# EAGLE board Mergen Telemetri + Ateşleme (EAGLE 9.6.2)
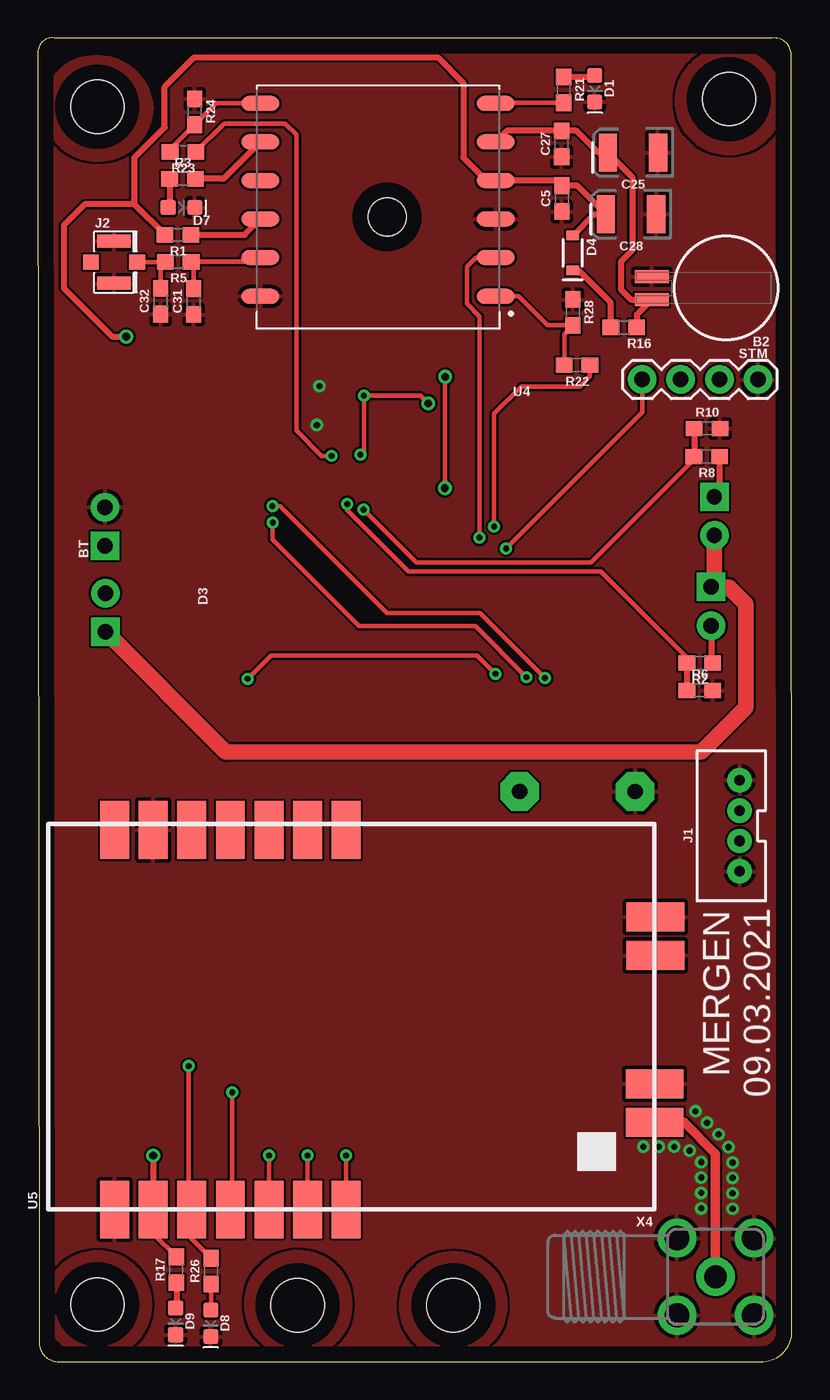
[diagram p0: board, top side]
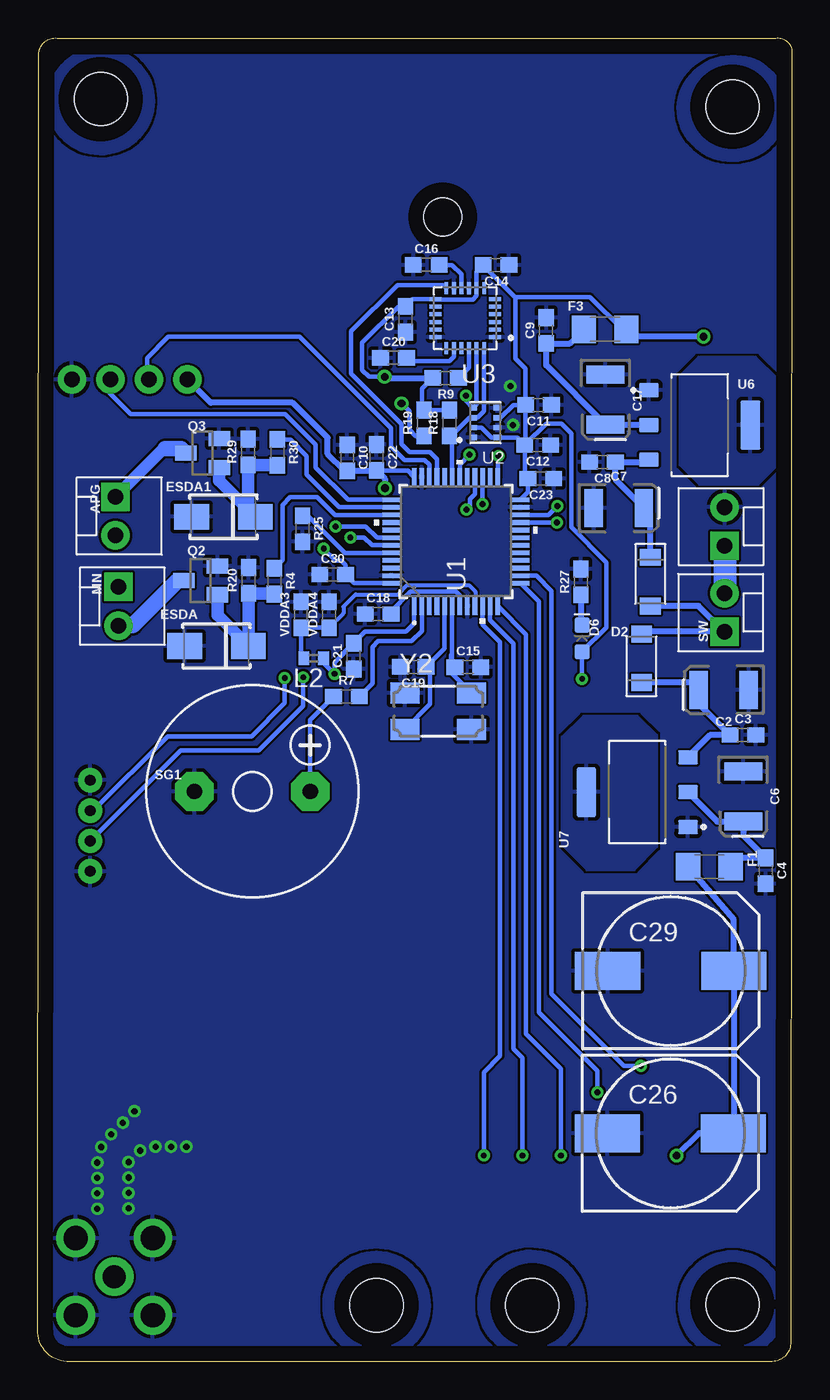
[diagram p1: board, bottom side, seen from below]

Size 49.66 x 87.16 mm. Coordinates in mm from the lower left corner, seen from the top.
Outline: 0,86.34 0.08,1.3 arc90 1.27,0 47.6,0 arc90 49.66,1.88 49.61,86.19 arc90 48.39,87.15 1.06,87.15 arc90 0,86.34
Copper layers (1*16): Top 0.035mm / dielectric 1.5mm / Bottom 0.035mm
Design rules "default": minimum track width 6mil, minimum drill 0.35mm, track to track 6mil, track to pad 6mil, pad to pad 6mil, via to via 6mil, smd to smd 6mil, copper to edge 40mil, drill to drill 6mil, minimum pad ring 10mil, minimum via ring 8mil, stop-mask expansion 4mil, vias tented up to drill 0mil, thermal gap 10mil
Net classes: 1 Power: width 0.305 mm
Holes 3.5 mm at 3.91,82.63 45.52,83.13 27.36,3.71 3.91,3.76 17.09,3.71
Holes 2.5 mm at 23,75.38

## Footprints (pad centres in the part's own frame; a part is rotated, then mirrored left to right if it is on the bottom)
MOLEX-1X2 = drill 1.016 pad 1.88 square: 1 0,0 | drill 1.016 pad 1.88: 2 2.54,0
BATTCON-6.8MM = smd 2.25 x 0.85: + 4.87,0.75; - 4.87,-0.75
EIA3528 = smd 1.2 x 2.5: A 1.65,0; C -1.65,0
0603 = smd 1.1 x 1: 1 -0.85,0; 2 0.85,0
150CLZ-1010 = smd 4.3 x 2.5: + 4.15,0; - -4.15,0
LED-0603 = smd 1 x 1: A -0.877,0; C 0.877,0
SODFL3718X115 = smd 1.115 x 1.361: 1 -1.6,0; 2 1.6,0
SOD-323 = smd 0.63 x 0.83: A 1.15,0; C -1.15,0
WE-TVSP_DO-214AC_UNIDIRECTIONAL = smd 2.3 x 1.7: 1 -2.1,0; 2 2.1,0
1206 = smd 1.6 x 1.8: 1 -1.4,0; 2 1.4,0
JST-4-PTH-VERT = drill 0.7 pad 1.6: 1 -3,-0.55; 2 -1,-0.55; 3 1,-0.55; 4 3,-0.55
U.FL = smd 2.2 x 0.85: 1 0,1.375; 2 0,-1.375 | smd 1.05 x 1: FEED 1.525,0; NC -1.525,0
0402 = smd 0.7 x 0.9: 1 -0.65,0; 2 0.65,0
SOT23 = smd 1 x 1.4: 1 -0.95,-1.1; 2 0.95,-1.1; 3 0,1.1
F/CM12P = drill 1.016 pad 2.54 octagon: + 3.81,0; - -3.81,0
1X04 = drill 1.016 pad 1.88: 1 0,0; 2 2.54,0; 3 5.08,0; 4 7.62,0
LQFP48-7X7MM = smd 1.194 x 0.305: 1 -4.25,2.75; 2 -4.25,2.25; 3 -4.25,1.75; 4 -4.25,1.25; 5 -4.25,0.75; 6 -4.25,0.25; 7 -4.25,-0.25; 8 -4.25,-0.75; 9 -4.25,-1.25; 10 -4.25,-1.75; 11 -4.25,-2.25; 12 -4.25,-2.75; 25 4.25,-2.75; 26 4.25,-2.25; 27 4.25,-1.75; 28 4.25,-1.25; 29 4.25,-0.75; 30 4.25,-0.25; 31 4.25,0.25; 32 4.25,0.75; 33 4.25,1.25; 34 4.25,1.75; 35 4.25,2.25; 36 4.25,2.75 | smd 0.305 x 1.194: 13 -2.75,-4.25; 14 -2.25,-4.25; 15 -1.75,-4.25; 16 -1.25,-4.25; 17 -0.75,-4.25; 18 -0.25,-4.25; 19 0.25,-4.25; 20 0.75,-4.25; 21 1.25,-4.25; 22 1.75,-4.25; 23 2.25,-4.25; 24 2.75,-4.25; 37 2.75,4.25; 38 2.25,4.25; 39 1.75,4.25; 40 1.25,4.25; 41 0.75,4.25; 42 0.25,4.25; 43 -0.25,4.25; 44 -0.75,4.25; 45 -1.25,4.25; 46 -1.75,4.25; 47 -2.25,4.25; 48 -2.75,4.25
XDCR_BMP280 = smd 0.5 x 0.35: 1 0.8,0.975; 2 0.8,0.325; 3 0.8,-0.325; 4 0.8,-0.975; 5 -0.8,-0.975; 6 -0.8,-0.325; 7 -0.8,0.325; 8 -0.8,0.975
QFN50P400X400X95-24N = smd 0.79 x 0.26: 1 -1.97,1.25; 2 -1.97,0.75; 3 -1.97,0.25; 4 -1.97,-0.25; 5 -1.97,-0.75; 6 -1.97,-1.25; 13 1.97,-1.25; 14 1.97,-0.75; 15 1.97,-0.25; 16 1.97,0.25; 17 1.97,0.75; 18 1.97,1.25 | smd 0.26 x 0.79: 7 -1.25,-1.97; 8 -0.75,-1.97; 9 -0.25,-1.97; 10 0.25,-1.97; 11 0.75,-1.97; 12 1.25,-1.97; 19 1.25,1.97; 20 0.75,1.97; 21 0.25,1.97; 22 -0.25,1.97; 23 -0.75,1.97; 24 -1.25,1.97
XCVR_L86 = smd 2.5 x 1: 1 -7.75,6.35; 2 -7.75,3.81; 3 -7.75,1.27; 4 -7.75,-1.27; 5 -7.75,-3.81; 6 -7.75,-6.35; 7 7.75,-6.35; 8 7.75,-3.81; 9 7.75,-1.27; 10 7.75,1.27; 11 7.75,3.81; 12 7.75,6.35
E32-868T30S = smd 3.81 x 1.905: 3V3 12.3,5.08; AUX -12.7,7.62; GND@0 -12.7,12.7; GND@1 12.3,10.16; M0 -12.7,-2.54; M1 -12.7,0; PB0 12.3,-2.54; PB1 12.3,0; PB3 12.3,2.54; RST 12.3,12.7; RX -12.7,2.54; SWIM 12.3,7.62; TX -12.7,5.08; VCC -12.7,10.16 | smd 1.905 x 3.81: ANT -6.97,-22.86; GND@2 6.57,-22.91; GND@3 4.03,-22.91; GND@4 -4.43,-22.86
SOT229P700X180-4N = smd 0.93 x 1.31: 1 -2.29,-3.345; 2 0,-3.345; 3 2.29,-3.345 | smd 3.24 x 1.31: 4 0,3.345
SMA90_DIP = drill 1.5 pad 2.54: ANTENNA 0,0 | drill 1.6 pad 2.54: GND1 -2.54,2.54; GND2 2.54,2.54; GND3 -2.54,-2.54; GND4 2.54,-2.54
OSCCC500X320X110-4N = smd 1.9 x 1.4: 1 -2.2,-1.2; 2 2.2,-1.2; 3 2.2,1.2; 4 -2.2,1.2

## Placement (x,y rotation side)
APG  [MOLEX-1X2]  44.55,56.95 270 bottom
B2  6.8MM_COIN_CELL  [BATTCON-6.8MM]  45.31,70.69 180 top
BT  [MOLEX-1X2]  4.42,53.72 90 bottom
C2  22uF  [EIA3528]  4.5,44.22 180 bottom
C3  100nF  [0603]  3.23,41.25 0 bottom
C4  100nF  [0603]  1.73,32.31 270 bottom
C5  100nF  [0603]  34.52,76.58 90 top
C6  22uF  [EIA3528]  3.2,37.21 270 bottom
C7  22uF  [EIA3528]  11.4,56.21 0 bottom
C8  100nF  [0603]  12.47,59.23 180 bottom
C9  100nF  [0603]  16.18,67.89 90 bottom
C10  4.7uF  [0603]  29.29,59.51 270 bottom
C11  100nF  [0603]  16.69,62.99 180 bottom
C12  100nF  [0603]  16.74,60.35 180 bottom
C13  100nF  [0603]  25.45,68.63 90 bottom
C14  10nF  [0603]  19.48,72.21 180 bottom
C15  25pF  [0603]  21.34,45.72 0 bottom
C16  100nF  [0603]  24.08,72.21 0 bottom
C17  22uF  [EIA3528]  12.27,63.35 270 bottom
C18  0.1uF  [0603]  27.25,49.23 0 bottom
C19  25pF  [0603]  24.94,45.75 180 bottom
C20  2.2nF  [0603]  26.24,66.09 0 bottom
C21  0.1uF  [0603]  28.85,46.46 90 bottom
C22  0.1uF  [0603]  27.36,59.54 270 bottom
C23  0.1uF  [0603]  16.54,58.14 180 bottom
C25  4.7uF  [EIA3528]  39.19,79.6 180 top
C26  1000uF  [150CLZ-1010]  8,15.04 0 bottom
C27  100nF  [0603]  34.49,80.19 90 top
C28  10uF  [EIA3528]  39.07,75.54 180 top
C29  1000uF  [150CLZ-1010]  7.98,25.73 0 bottom
C30  0.1uF  [0603]  30.25,51.82 0 bottom
C31  0.1uF  [0603]  10.26,69.8 90 top
C32  0.1uF  [0603]  8.08,69.82 90 top
D1  [LED-0603]  36.68,83.82 270 top
D2  MBR0520LT1G  [SODFL3718X115]  9.91,46.3 90 bottom
D3  MBR0520LT1G  [SODFL3718X115]  9.32,51.36 270 bottom
D4  0.5A/40V/420mV  [SOD-323]  35.23,73 90 top
D6  [LED-0603]  13.82,47.62 90 bottom
D7  [LED-0603]  9.45,76 0 top
D8  [LED-0603]  11.38,2.51 270 top
D9  [LED-0603]  9.07,2.64 270 top
ESDA  12V  [WE-TVSP_DO-214AC_UNIDIRECTIONAL]  37.9,47.12 180 bottom
ESDA1  12V  [WE-TVSP_DO-214AC_UNIDIRECTIONAL]  37.44,55.63 180 bottom
F1  1A  [1206]  5.44,32.59 180 bottom
F3  0.75A  [1206]  12.29,67.97 0 bottom
J1  [JST-4-PTH-VERT]  45.67,35.28 90 top
J2  U.FL  [U.FL]  5.02,72.4 0 top
L2  BLM15HB221SN1  [0402]  31.5,46.3 180 bottom
MN  [MOLEX-1X2]  44.35,51 270 bottom
Q2  IRLML6344TRPBF  [SOT23]  38.94,51.44 90 bottom
Q3  IRLML6344TRPBF  [SOT23]  38.81,59.82 90 bottom
R1  10k  [0603]  9.22,74.19 180 top
R2  10k  [0603]  43.59,46 180 top
R3  100  [0603]  9.52,77.88 0 top
R4  20  [0603]  34.09,51.38 270 bottom
R5  0  [0603]  9.25,72.42 180 top
R6  3k3  [0603]  43.59,44.2 0 top
R7  220  [0603]  29.34,43.79 0 bottom
R8  10k  [0603]  44.04,59.59 180 top
R9  4k7  [0603]  22.81,64.77 180 bottom
R10  3k3  [0603]  44.07,61.44 0 top
R16  1k  [0603]  38.58,68.1 180 top
R17  1k5  [0603]  9.12,6.05 90 top
R18  4k7  [0603]  22.56,61.8 90 bottom
R19  4k7  [0603]  24.23,61.8 90 bottom
R20  4k7  [0603]  35.79,51.44 90 bottom
R21  470  [0603]  34.62,83.74 270 top
R22  680  [0603]  35.51,65.61 180 top
R23  680  [0603]  9.55,79.65 180 top
R24  10k  [0603]  10.31,82.3 270 top
R25  10k  [0603]  32.23,54.84 270 bottom
R26  3k3  [0603]  11.4,5.94 90 top
R27  1k  [0603]  13.89,51.33 90 bottom
R28  10k  [0603]  35.23,69.09 270 top
R29  4k7  [0603]  35.81,59.89 90 bottom
R30  20  [0603]  33.88,59.87 270 bottom
SG1  F/CM12P  [F/CM12P]  35.53,37.54 0 bottom
STM  [1X04]  47.42,64.67 180 top
SW  [MOLEX-1X2]  4.45,48.06 90 bottom
U1  [LQFP48-7X7MM]  22.12,54 90 bottom
U2  BMP280  [XDCR_BMP280]  20.19,61.82 180 bottom
U3  MPU-6050  [QFN50P400X400X95-24N]  21.51,68.71 180 bottom
U4  L86  [XCVR_L86]  22.4,76.5 180 top
U5  [E32-868T30S]  17.75,22.71 90 top
U6  AMS1117-3.3  [SOT229P700X180-4N]  6.07,61.67 270 bottom
U7  AMS1117-3.3  [SOT229P700X180-4N]  10.19,37.49 90 bottom
VDDA3  1uF  [0603]  32.33,49.17 90 bottom
VDDA4  100nF  [0603]  30.48,49.17 90 bottom
X4  [SMA90_DIP]  44.63,5.59 90 top
Y2  ABM3B-26.000MHZ-10-1-U-T  [OSCCC500X320X110-4N]  23.29,42.82 0 bottom

## Library data of the parts
APG BT MN SW = SparkFun-Connectors; SF_ID: PRT-09918
B2 = SparkFun-Batteries; PROD_ID: BATT-13734
C2 C6 C7 C17 C25 C28 = SparkFun-Capacitors; PROD_ID: CAP-08310
C3-C5 C8-C16 C18-C23 C27 C30-C32 = SparkFun-Capacitors; PROD_ID: CAP-00868
C26 C29 X4 = adafruit
D1 D6-D9 = SparkFun-LED
D2 D3 = Diode; CATEGORY: Diode; DESCRIPTION: DIODE SCHOTTKY 20V 500MA SOD123; MANUFACTURER: ON Semiconductor; MPN: MBR0520LT1G; SUB-CATEGORY: Schottky
D4 = SparkFun-DiscreteSemi; PROD_ID: DIO-10955
ESDA ESDA1 = Wurth_EMC Components_WE-TVSP; DATASHEET-URL: https://www.we-online.com/catalog/datasheet/824500102.pdf; IPEAK: 2.5A; MOUNT: SMT; PART-NUMBER: 824500102; PDISS: 400W; VBR: 117V; VCLAMP: 162V
F1 F3 = SparkFun-Fuses; PROD_ID: RES-08585
J1 = SparkFun-Connectors; PROD_ID: CONN-13251
J2 = SparkFun-Connectors; PROD_ID: CONN-09193; SF_ID: WRL-09144
L2 = inductors
Q2 Q3 = IRLML6344TRPBF (1); AVAILABILITY: Unavailable; DESCRIPTION: RoHS Compliant | Low RDS(on) | Industry-Standard Pinout | Compatible with Existing Surface Mount Techniques | Qualified MSL1 | SOT-23 Footprint; MF: Infineon; MP: IRLML6344TRPBF; PACKAGE: SOT-23-3 International Rectifier; PRICE: None
R1-R10 R16-R30 = SparkFun-Resistors; PROD_ID: RES-07856
SG1 = buzzer; OC_FARNELL: unknown; OC_NEWARK: unknown
STM = SparkFun-Connectors; PROD_ID: CONN-09696
U1 = STM32F303; BUILT_BY: EMA_UL_Team; COPYRIGHT: Copyright (C) 2018 Accelerated Designs. All rights reserved; MANUFACTURER_PART_NUMBER: STM32F303CCT6; SOURCELIBRARY: Updates_to_database_2020-10-19; VENDOR: STMicroelectronics
U2 = BMP280; AVAILABILITY: Warning; DESCRIPTION: Pressure Sensor 4.35PSI ~ 15.95PSI (30kPa ~ 110kPa) Absolute 16b 8-SMD; MF: Bosch; MP: BMP280; PACKAGE: SMD-8 Bosch Sensortec; PRICE: None; PURCHASE-URL: https://pricing.snapeda.com/search/part/BMP280/?ref=eda
U3 = MPU-6050; AVAILABILITY: Warning; DESCRIPTION: Accelerometer, Gyroscope, 6 Axis Sensor I²C Output; MF: TDK InvenSense; MP: MPU-6050; PACKAGE: QFN-24 InvenSense; PRICE: None; PURCHASE-URL: https://pricing.snapeda.com/search/part/MPU-6050/?ref=eda
U4 = L86; AVAILABILITY: Unavailable; DESCRIPTION: L86 is an ultra-compact GNSS POT (Patch on Top) module with an embedded 18.4mm × 18.4mm × 4.0mm patch antenna and utilizes the MediaTek new generation GNSS chipset MT3333 that achieves the perfect performance; MF: Quectel; MP: L86; PACKAGE: PowerSFN-8 Quectel; PRICE: None
U5 = E32-868T30S
U6 U7 = AMS1117-3.3; AVAILABILITY: Unavailable; DESCRIPTION: Sot223/Pkg 1-Amp 3.3-Volt Low Drop Out Voltage Regulatator; MF: Advanced Monolithic Systems; MP: AMS1117-3.3; PACKAGE: SOT-89 ams; PRICE: None
VDDA3 VDDA4 = SparkFun-Capacitors; PROD_ID: CAP-00810
Y2 = ABM3B-26.000MHZ-10-1-U-T; AVAILABILITY: Good; DESCRIPTION: 26MHz ±10ppm Crystal 10pF 50 Ohms 4-SMD, No Lead; MF: Abracon; MP: ABM3B-26.000MHZ-10-1-U-T; PACKAGE: SMD-4 Abracon LLC; PRICE: None; PURCHASE-URL: https://pricing.snapeda.com/search/part/ABM3B-26.000MHZ-10-1-U-T/?ref=eda

## Nets
3.3V: C5.2 C10.2 C11.2 C12.2 C13.2 C14.2 C21.2 C22.2 C23.2 C28.A C30.2 D4.A D6.A F3.2 L2.1 R1.2 R9.2 R18.2 R19.2 STM.4 U1.1 U1.24 U1.36 U1.48 U2.2 U2.6 U2.8 U3.8 U3.13 U4.4
5V: C26.+ C29.+ F1.2 R17.2 U5.VCC
APG: APG.1 Q3.3 R8.1
APG_F: R30.1 U1.38
APG_S: R8.2 R10.1 U1.28
AUX: R26.2 U1.14 U5.AUX
BT0: R25.1 U1.44
BZZR: R7.2 U1.2
FN: R23.1 U1.25
GND: B2.- BT.2 C2.C C3.2 C4.2 C5.1 C6.C C7.C C8.2 C9.2 C10.1 C11.1 C12.1 C13.1 C14.1 C15.2 C16.1 C17.C C18.1 C19.2 C20.1 C21.1 C22.1 C23.1 C25.C C26.- C27.1 C28.C C29.- C30.1 C31.1 C32.1 D1.C D7.C D8.C D9.C ESDA1.2 ESDA.2 J1.1 J1.4 J2.1 J2.2 Q2.2 Q3.2 R6.2 R10.2 R20.2 R24.1 R25.2 R27.2 R28.1 R29.2 SG1.- STM.1 U1.8 U1.23 U1.35 U1.47 U2.1 U2.5 U2.7 U3.1 U3.9 U3.11 U3.18 U4.3 U4.12 U5.GND@0 U5.GND@1 U5.GND@2 U5.GND@3 U5.GND@4 U6.1 U7.1 VDDA3.2 VDDA4.2 X4.GND1 X4.GND2 X4.GND3 X4.GND4 Y2.2 Y2.4
HT: U7.4
HT2: U6.4
INT: U1.33 U3.12
M0: U1.10 U5.M0
M1: U1.11 U5.M1
MAIN: MN.2 Q2.3 R2.1
MAIN_F: R4.1 U1.39
MAIN_S: R2.2 R6.1 U1.27
N$1: C2.A C3.1 D2.1 U7.3
N$2: C7.A C8.1 D3.1 U6.3
N$3: R1.1 U4.10
N$4: C4.1 C6.A F1.1 U7.2
N$5: C9.1 C17.A F3.1 U6.2
N$6: ESDA1.1 Q3.1 R29.1 R30.2
N$7: U5.ANT X4.ANTENNA
N$8: R7.1 SG1.+
N$9: BT.1 SW.2
N$10: R21.2 U4.6
N$11: D1.A R21.1
N$12: D4.C R16.2
N$13: ESDA.1 Q2.1 R4.2 R20.1
N$14: D9.A R17.1
N$15: D6.C R27.1
N$16: R3.2 U4.8
N$17: D7.A R3.1
N$18: C16.2 U3.10
N$19: C32.2 J2.FEED R5.2
N$20: R23.2 R24.2 U4.7
N$21: D8.A R26.1
N$22: C20.2 U3.20
NRST: C18.2 U1.7
OSC_IN: C19.1 U1.5 Y2.1
OSC_OUT: C15.1 U1.6 Y2.3
PIN22: R9.1 U3.22
RX1: U1.43 U4.2
RX2: U1.13 U5.TX
RX3: J1.3 U1.22
SCL: R19.1 U1.30 U2.4 U3.23
SDA: R18.1 U1.31 U2.3 U3.24
SWCLK: STM.2 U1.37
SWDIO: STM.3 U1.34
TX1: R22.1 U1.42
TX2: U1.12 U5.RX
TX3: J1.2 U1.21
TXD: R22.2 R28.2 U4.1
V_BCKP: B2.+ C25.A C27.2 R16.1 U4.5
VCC: APG.2 D2.2 D3.2 MN.1 SW.1
VDDA: L2.2 U1.9 VDDA3.1 VDDA4.1
XANT: C31.2 R5.1 U4.11

## Tracks (layer width: path | path; a pad name or v marks a point on that pad's centre or on a via)
3.3V  (via drill 0.38, 0.51)
  Top 0.305: v30.84,53.54 39.8,62.51 STM.4 | v30.12,45.29 28.91,46.51 15.37,46.51 v13.82,44.96 | v26.82,64.85 26.8,64.82 v26.8,57.51
  Top 0.381: v5.82,67.49 4.9,67.49 1.7,70.69 1.7,74.83 3.07,76.2 6.32,76.2 6.35,76.23 6.35,79.27 8.35,81.27 8.35,83.94 10.29,85.88 26.34,85.88 28.03,84.19 28.03,79.27 29.53,77.77 U4.4 34.17,77.77 C5.2 35.52,77.43 C28.A 36.62,75.54 D4.A
  Top 0.406: 6.35,76.23 6.35,76.21 R1.2
  Bottom 0.305: U2.2 20.98,61.51 20.43,61.51 19.77,60.85 U2.8 18.09,60.85 C12.2 | U1.1 24.87,48.58 25.4,48.06 28.1,48.06 C21.2 30.12,46.04 v30.12,45.29 30.85,46.01 L2.1 | U2.6 19.18,62.15 18.34,62.99 C11.2 | v26.82,64.85 27.86,64.85 28.3,65.28 28.3,67.08 25.9,69.48 C13.2 24.97,69.96 U3.13 23.47,69.94 21,69.94 20.76,70.18 U3.8 20.76,71.78 C14.2 18.22,70.1 18.2,70.1 | 18.2,70.1 18.2,66.06 17.54,65.39 C11.2 | v13.82,44.96 D6.A 12.22,48.35 12.22,52.63 14.53,54.94 14.53,61.11 15.19,61.77 16.17,61.77 17.54,60.4 | F3.2 11.18,67.97 13.31,70.1 18.2,70.1 | C11.2 17.54,60.4 | 17.54,60.4 C12.2 | U1.36 25.29,58.66 27.38,58.66 | U1.24 17.39,57.24 C23.2 17.59,58.34 C12.2 | U1.48 28.84,51.25 C30.2 29.4,52.44 29.69,52.73 30.05,52.73 30.84,53.52 v30.84,53.54 | R18.2 R19.2 24.36,62.78 24.36,64.07 R9.2
  Bottom 0.381: v5.82,67.49 10.41,67.49 F3.2
  Bottom 0.406: STM.4 38.28,63.14 32.89,63.14 30.58,60.83 30.58,59.77 29.48,58.66 C10.2 27.38,58.66 C22.2 26.8,58.13 v26.8,57.51 | v26.82,64.85 26.75,64.77 R9.2
5V  (via drill 0.51)
  Top 0.305: U5.VCC 7.59,8.42 R17.2
  Top 0.406: v7.59,13.56 U5.VCC
  Bottom 0.381: C29.+ 3.83,29.1 F1.2
  Bottom 0.406: C29.+ 3.83,15.06 C26.+ 6.12,15.04 v7.59,13.56
APG
  Top 0.305: APG.1
  Top 0.406: R8.1 44.89,57.29 APG.1
  Bottom 0.813: 41.28,60.12 41.38,60.12 APG.1
  Bottom 1.016: Q3.3 40.22,60.12 41.28,60.12
APG_F
  Bottom 0.305: U1.38 29.81,56.25 31.95,58.39 31.95,59.64 33.03,60.72 R30.1
APG_S  (via drill 0.38)
  Top 0.305: v21.44,56.11 24.94,52.6 36.41,52.6 43.19,59.39 R8.2
  Top 0.406: R10.1 43.22,59.61 R8.2
  Bottom 0.305: v21.44,56.11 21.21,56.34 21.21,56.79 20.87,57.13 U1.28
AUX  (via drill 0.38)
  Top 0.305: R26.2 10.06,8.14 10.06,8.56 10.13,8.64 U5.AUX 10.19,10.06 10.19,9.8 9.93,10.06 v9.93,19.46
  Bottom 0.305: v9.93,19.46 11.07,19.46 15.82,24.21 15.82,50.75 16.83,51.75 U1.14
BT0
  Bottom 0.305: U1.44 29.44,53.25 31.88,55.69 R25.1
BZZR
  Bottom 0.305: U1.2 24.37,48.12 25.04,47.45 27.25,47.45 27.64,47.07 27.64,44.64 R7.2
D
  pour Top: 0.38,82.55 arc-90 3.68,85.95 arc-90 7.54,82.58 arc-90 3.86,79.07 arc-90
  pour Top: 42.01,83.01 arc-90 45.54,86.49 arc-90 49.02,82.96 arc-90 45.52,79.5 arc-90
  pour Top: 0.43,3.76 arc-90 3.94,7.26 arc-90 7.44,3.73 arc-90 3.94,0.25 arc-90
  pour Top: 13.64,3.78 arc-90 17.17,7.29 arc-90 20.65,3.76 arc-90 17.15,0.28 arc-90
  pour Top: 23.85,3.73 arc-90 27.38,7.21 arc-90 30.86,3.73 arc-90 27.33,0.2 arc-90
  pour Bottom: 49.02,83.01 arc90 45.49,86.49 arc90 42.01,83.01 arc90 45.59,79.5 arc90
  pour Bottom: 7.54,82.58 arc90 3.68,85.95 arc90 0.38,82.55 arc90 3.86,79.07 3.91,79.07 arc90
  pour Bottom: 7.44,3.73 arc90 3.91,7.26 arc90 0.43,3.76 arc90 4.01,0.25 arc90
  pour Bottom: 20.65,3.84 arc90 17.17,7.29 arc90 13.64,3.76 arc90 17.17,0.28 arc90
  pour Bottom: 30.86,3.73 arc90 27.38,7.21 27.36,7.21 arc90 23.85,3.68 arc90 27.33,0.2 arc90
FN  (via drill 0.38)
  Top 0.305: v19.33,59.64 18.69,59.64 17.04,61.29 17.04,80.77 16.29,81.53 12.27,81.53 R23.1
  Bottom 0.305: v19.33,59.64 19.37,59.6 U1.25
GND  (via drill 0.41)
  other vias: 39.88,14.15 40.89,14.15 41.91,14.15 42.93,13.89 43.69,13.13 43.69,12.12 43.69,11.1 43.69,10.08 45.75,10.06 45.75,11.07 45.75,12.09 45.75,13.11 45.49,14.12 44.83,14.96 44.07,15.72 43.31,16.48 18.36,61.67 18.54,64.24
  pour Bottom (rank 2): -0.41,87.63 -0.41,-0.63 50.01,-0.63 50.01,87.63
  pour Top (rank 2): -0.89,88.14 -0.89,-1.07 50.27,-1.07 50.27,88.14
HT
  pour Bottom: 8.89,41.25 8.89,33.88 10.39,32.39 13.51,32.39 15.14,34.01 15.14,41.12 13.74,42.52 10.16,42.52
HT2
  pour Bottom: 0.94,64.72 2.36,66.14 6.15,66.14 7.37,64.92 7.37,59.03 6.1,57.76 2.21,57.76 0.94,59.03
INT
  Bottom 0.305: U3.12 22.98,70.89 25.98,70.89 29.03,67.84 29.03,65.06 25.7,61.73 25.7,60.43 25.17,59.89 23.83,59.89 23.37,59.44 U1.33
M0  (via drill 0.38)
  Top 0.305: v20.29,13.56 U5.M0
  Bottom 0.305: U1.10 20.37,48.54 19.23,47.4 19.23,20.12 20.29,19.05 v20.29,13.56
M1  (via drill 0.38)
  Top 0.305: v17.75,13.56 U5.M1
  Bottom 0.305: U1.11 19.87,48.83 18.34,47.29 18.34,20.57 17.75,19.99 v17.75,13.56
MAIN
  Top 0.406: MN.2 44.35,46.09 R2.1
  Bottom 1.016: Q2.3 40.44,51.44 43.42,48.46 MN.2
MAIN_F
  Bottom 0.305: U1.39 30.1,55.75 31.27,56.92 33.05,56.92 33.55,56.41 33.55,52.77 R4.1
MAIN_S  (via drill 0.38)
  Top 0.305: v20.37,56.46 20.37,56.06 24.41,52.02 37.08,52.02 42.74,46.37 R2.2
  Top 0.406: R2.2 R6.1
  Bottom 0.305: v20.37,56.46 U1.27
N$1
  Bottom 0.381: U7.3 6.84,39.81 5.4,41.25 C3.1 6.15,43.32 C2.A 6.63,44.7 D2.1
N$2
  Bottom 0.381: D3.1 9.32,55.78 C7.A 11.62,58.08 C8.1 9.62,59.23 9.45,59.41 U6.3
N$3
  Top 0.406: R1.1 13.61,74.19 U4.10
N$4
  Bottom 0.381: U7.2 4.91,35.56 C6.A 3.2,34.63 C4.1 3.47,33.16 F1.1
N$5
  Bottom 0.381: U6.2 12.24,61.67 C17.A 16.18,65.61 C9.1 14.62,67.04 F3.1
N$6
  Bottom 0.813: Q3.1 37.71,58 ESDA1.1 35.81,56.1 R29.1 35.79,59.02 R30.2
N$7
  Top 0.61: X4.ANTENNA 44.63,13.67 42.56,15.74 U5.ANT
N$8
  Bottom 0.305: R7.1 31.72,42.25 SG1.+
N$9
  Bottom 1.524: BT.1 4.42,50.62 SW.2
N$10
  Top 0.305: R21.2 30.19,82.89 U4.6
N$11
  Top 0.406: R21.1 36.57,84.59 D1.A
N$12
  Top 0.381: R16.2 37.73,69.73 35.62,71.85 D4.C
N$13
  Bottom 0.813: Q2.1 37.84,49.16 ESDA.1 R20.1 34.14,50.59 R4.2
N$14
  Top 0.381: R17.1 9.12,3.57 D9.A
N$15
  Bottom 0.381: R27.1 13.89,48.58 D6.C
N$16
  Top 0.406: U4.8 12.21,77.88 R3.2
N$17
  Top 0.406: R3.1 8.68,76.1 D7.A
N$18
  Bottom 0.305: U3.10 21.76,71.6 22.38,72.21 C16.2
N$19
  Top 0.305: C32.2 8.08,72.1 R5.2 8.38,72.4 J2.FEED
N$20
  Top 0.305: R23.2 8.7,79.83 R24.2 11.72,82.85 U4.7
N$21
  Top 0.305: R26.1 11.4,3.42 D8.A
N$22
  Bottom 0.305: U3.20 22.26,66.16 22.56,65.86 25.16,65.86 C20.2
NRST
  Bottom 0.305: U1.7 21.87,50.45 22.12,50.69 25.11,50.69 26.4,49.4 C18.2
OSC_IN
  Bottom 0.305: U1.5 22.87,46.96 C19.1 23.83,45.48 23.83,43.29 Y2.1
OSC_OUT
  Bottom 0.305: Y2.3 22.44,45.37 22.44,46.53 22.37,46.6 | C15.1 22.37,45.53 22.37,46.6 | U1.6 22.37,46.6
PIN22
  Bottom 0.305: R9.1 21.26,65.47 U3.22
RX1  (via drill 0.38)
  Top 0.305: v29.08,54.25 29.08,68.81 28.24,69.65 28.24,72.09 28.85,72.69 U4.2
  Bottom 0.305: U1.43 27.66,53.75 28.17,54.25 v29.08,54.25
RX2  (via drill 0.38)
  Top 0.305: v12.8,17.73 12.8,10.13 U5.TX
  Bottom 0.305: U1.13 16.67,50.05 16.67,23 12.8,19.13 v12.8,17.73
RX3  (via drill 0.38)
  Top 0.305: v33.4,45.01 29.11,49.3 22.99,49.3 15.95,56.34 v15.44,56.34
  Bottom 0.305: J1.3 46.02,36.28 41.12,41.17 35.59,41.17 33.4,43.36 v33.4,45.01 | v15.44,56.34 16.03,55.75 U1.22
SCL  (via drill 0.38, 0.51)
  Top 0.305: v21.23,59.72 21.46,59.94 v21.46,63.6 25.2,63.6 v25.7,63.09
  Bottom 0.305: U3.23 20.76,63.03 U2.4 21.46,63.27 v21.46,63.6 | v21.23,59.72 21.87,59.08 U1.30 | v25.7,63.09 25.2,62.59 25.2,61.37 24.78,60.95 R19.1
SDA
  Bottom 0.305: U3.24 20.26,62.59 20.71,62.15 U2.3 21.23,62.15 22.47,60.9 | R18.1 22.54,60.97 22.47,60.9 | 22.47,60.9 22.37,60.8 U1.31
SWCLK
  Bottom 0.305: U1.37 29.24,56.75 31.37,58.88 31.37,60.38 33.39,62.4 43.55,62.4 44.93,63.78 44.93,64.62 STM.2
SWDIO
  Bottom 0.305: U1.34 23.87,59.05 24.18,59.36 25.5,59.36 26.4,60.26 26.4,61.45 32.44,67.49 41.07,67.49 42.47,66.09 42.47,64.8 STM.3
TX1  (via drill 0.38)
  Top 0.305: v30.05,54.99 30.05,62.41 31.85,64.21 35.69,64.21 36.36,64.88 R22.1
  Bottom 0.305: U1.42 27.33,54.25 28.07,54.99 v30.05,54.99
TX2  (via drill 0.38)
  Top 0.305: v15.21,13.56 U5.RX
  Bottom 0.305: U1.12 17.5,47.88 17.5,21.56 15.21,19.28 v15.21,13.56
TX3  (via drill 0.38)
  Top 0.305: v32.18,45.06 28.8,48.44 21.16,48.44 15.47,54.13 v15.47,55.25
  Bottom 0.305: J1.2 40.27,40.23 35.13,40.23 32.18,43.18 v32.18,45.06 | v15.47,55.25 U1.21
TXD
  Top 0.305: R22.2 34.66,67.67 R28.2 33.57,68.24 31.65,70.15 U4.1
V_BCKP
  Top 0.381: R16.1 39.43,68.93 B2.+ 39.05,69.94 38.4,70.59 38.4,72.44 39.14,73.18 39.14,78 C25.A 36.91,79.6 35.47,81.04 C27.2 30.88,81.04 U4.5
VCC
  Top 1.016: APG.2 44.55,51.21 MN.1 45.52,51 46.63,49.89 46.63,43.08 43.69,40.13 12.37,40.13 SW.1
  Bottom 0.381: D3.2 6.15,49.76 SW.1 9.75,48.06 D2.2
VDDA
  Bottom 0.254: VDDA4.1 29.54,49.26 29.54,49.71 28.73,50.52 25.94,50.52 25.33,51.13 21.28,51.13 20.85,50.7 20.85,49.77 U1.9
  Bottom 0.305: VDDA4.1 VDDA3.1 32.33,46.49 L2.2
XANT
  Top 0.305: C31.2 10.26,72.25 R5.1 14.37,72.42 U4.11

## Text on the board
tPlace: MERGEN / 09.03.2021